# EAGLE board PCB BOARD (EAGLE 9.0.0)
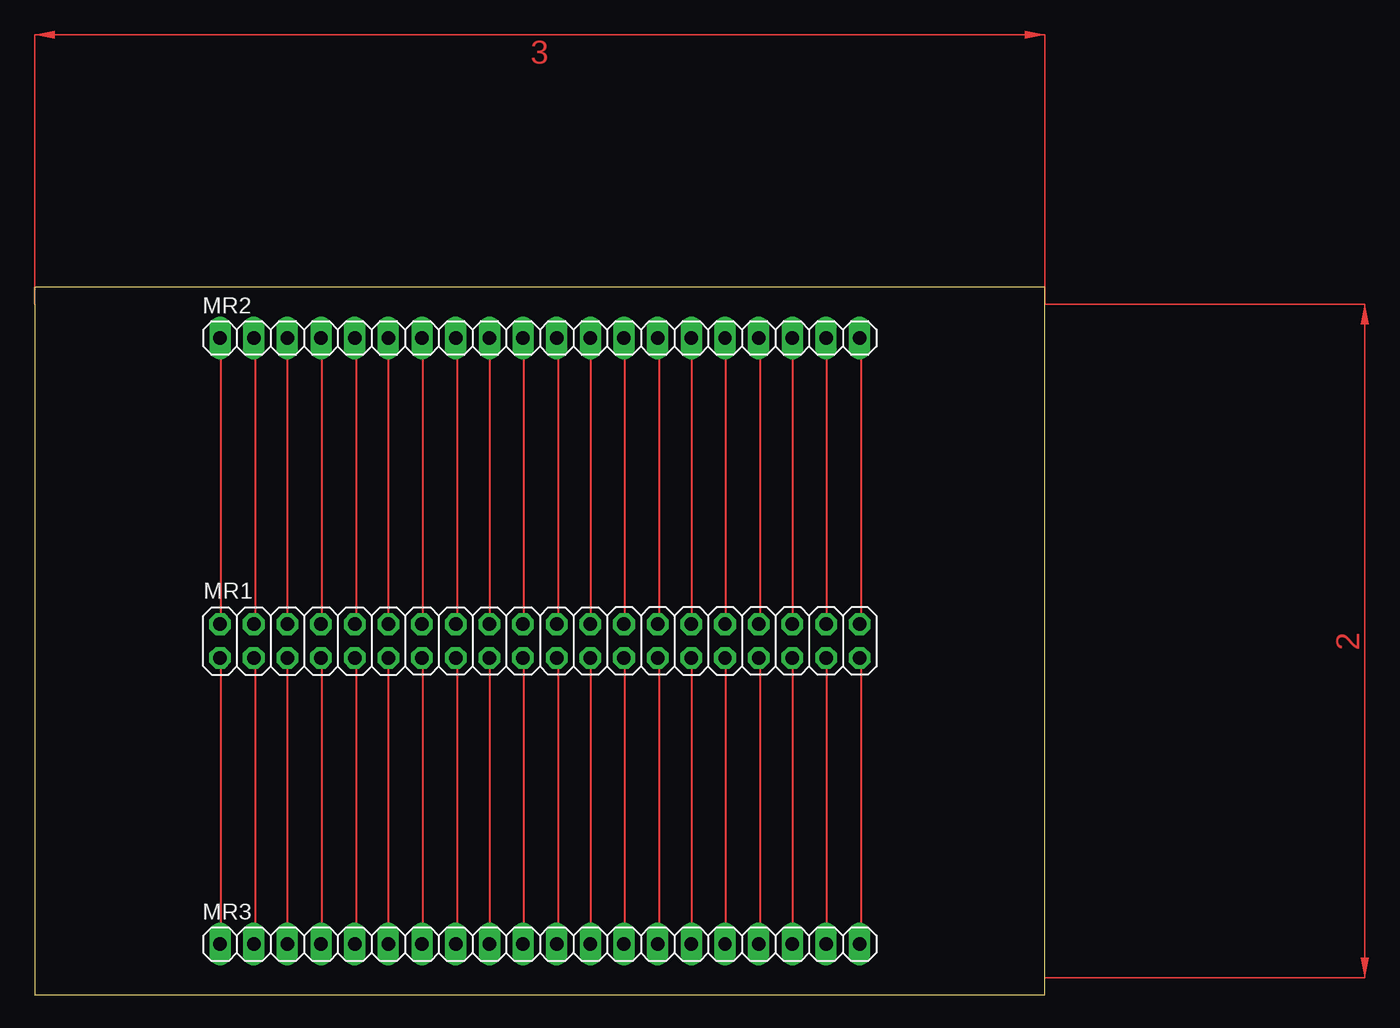
[diagram p0: board, top side]

Size 76.2 x 53.34 mm. Coordinates in mm from the lower left corner, seen from the top.
Outline: 0,0 76.2,0 76.2,53.34 0,53.34 0,0
Copper layers (1*16): Top 0.035mm / dielectric 1.5mm / Bottom 0.035mm
Design rules "SparkFun": minimum track width 8mil, minimum drill 20mil, track to track 8mil, track to pad 8mil, pad to pad 8mil, via to via 8mil, smd to smd 8mil, copper to edge 10mil, drill to drill 8mil, minimum pad ring 12mil, minimum via ring 10mil, stop-mask expansion 4mil, vias tented up to drill 25mil, thermal gap 10mil

## Footprints (pad centres in the part's own frame; a part is rotated, then mirrored left to right if it is on the bottom)
2X20 = drill 1.016 octagon: 1 -24.13,-1.27; 2 -24.13,1.27; 3 -21.59,-1.27; 4 -21.59,1.27; 5 -19.05,-1.27; 6 -19.05,1.27; 7 -16.51,-1.27; 8 -16.51,1.27; 9 -13.97,-1.27; 10 -13.97,1.27; 11 -11.43,-1.27; 12 -11.43,1.27; 13 -8.89,-1.27; 14 -8.89,1.27; 15 -6.35,-1.27; 16 -6.35,1.27; 17 -3.81,-1.27; 18 -3.81,1.27; 19 -1.27,-1.27; 20 -1.27,1.27; 21 1.27,-1.27; 22 1.27,1.27; 23 3.81,-1.27; 24 3.81,1.27; 25 6.35,-1.27; 26 6.35,1.27; 27 8.89,-1.27; 28 8.89,1.27; 29 11.43,-1.27; 30 11.43,1.27; 31 13.97,-1.27; 32 13.97,1.27; 33 16.51,-1.27; 34 16.51,1.27; 35 19.05,-1.27; 36 19.05,1.27; 37 21.59,-1.27; 38 21.59,1.27; 39 24.13,-1.27; 40 24.13,1.27
1X20 = drill 1.016 long: 1 -24.13,0; 2 -21.59,0; 3 -19.05,0; 4 -16.51,0; 5 -13.97,0; 6 -11.43,0; 7 -8.89,0; 8 -6.35,0; 9 -3.81,0; 10 -1.27,0; 11 1.27,0; 12 3.81,0; 13 6.35,0; 14 8.89,0; 15 11.43,0; 16 13.97,0; 17 16.51,0; 18 19.05,0; 19 21.59,0; 20 24.13,0

## Placement (x,y rotation side)
MR1  [2X20]  38.1,26.67 0 top
MR2  [1X20]  38.1,49.53 0 top
MR3  [1X20]  38.1,3.81 0 top

## Library data of the parts
MR1-MR3 = pinhead

## Nets
GND: MR1.21 MR3.11
N$1: MR1.1 MR3.1
N$2: MR1.9 MR3.5
N$3: MR1.3 MR3.2
N$4: MR1.5 MR3.3
N$5: MR1.7 MR3.4
N$6: MR1.11 MR3.6
N$7: MR1.13 MR3.7
N$8: MR1.15 MR3.8
N$9: MR1.17 MR3.9
N$10: MR1.19 MR3.10
N$11: MR1.2 MR2.1
N$13: MR1.25 MR3.13
N$14: MR1.27 MR3.14
N$15: MR1.29 MR3.15
N$16: MR1.31 MR3.16
N$17: MR1.33 MR3.17
N$18: MR1.35 MR3.18
N$19: MR1.37 MR3.19
N$20: MR1.39 MR3.20
N$21: MR1.40 MR2.20
N$22: MR1.38 MR2.19
N$23: MR1.36 MR2.18
N$24: MR1.34 MR2.17
N$25: MR1.32 MR2.16
N$26: MR1.30 MR2.15
N$27: MR1.28 MR2.14
N$28: MR1.26 MR2.13
N$29: MR1.24 MR2.12
N$30: MR1.22 MR2.11
N$31: MR1.20 MR2.10
N$32: MR1.18 MR2.9
N$33: MR1.16 MR2.8
N$34: MR1.14 MR2.7
N$35: MR1.12 MR2.6
N$36: MR1.10 MR2.5
N$37: MR1.8 MR2.4
N$38: MR1.6 MR2.3
N$39: MR1.4 MR2.2
VCC: MR1.23 MR3.12

## Tracks (layer width: path | path; a pad name or v marks a point on that pad's centre or on a via)
GND
  Top 0.152: MR3.11 39.47,3.86 39.47,25.35 MR1.21
N$1
  Top 0.152: MR3.1 14.02,3.86 14.02,25.35 MR1.1
N$2
  Top 0.152: MR3.5 24.23,3.86 24.23,25.35 MR1.9
N$3
  Top 0.152: MR3.2 16.61,3.86 16.61,25.35 MR1.3
N$4
  Top 0.152: MR1.5 MR3.3
N$5
  Top 0.152: MR3.4 21.64,3.86 21.64,25.35 MR1.7
N$6
  Top 0.152: MR1.11 MR3.6
N$7
  Top 0.152: MR3.7 29.26,3.86 29.26,25.35 MR1.13
N$8
  Top 0.152: MR3.8 31.85,3.86 31.85,25.35 MR1.15
N$9
  Top 0.152: MR1.17 MR3.9
N$10
  Top 0.152: MR3.10 36.88,3.86 36.88,25.35 MR1.19
N$11
  Top 0.152: MR1.2 14.02,27.94 14.02,48.16 MR2.1
N$13
  Top 0.152: MR3.13 44.5,3.86 44.5,25.35 MR1.25
N$14
  Top 0.152: MR3.14 47.09,3.86 47.09,25.35 MR1.27
N$15
  Top 0.152: MR1.29 MR3.15
N$16
  Top 0.152: MR3.16 52.12,3.86 52.12,25.35 MR1.31
N$17
  Top 0.152: MR3.17 54.71,3.86 54.71,25.35 MR1.33
N$18
  Top 0.152: MR1.35 MR3.18
N$19
  Top 0.152: MR3.19 59.74,3.86 59.74,25.35 MR1.37
N$20
  Top 0.152: MR3.20 62.33,3.86 62.33,25.35 MR1.39
N$21
  Top 0.152: MR1.40 62.33,27.94 62.33,49.43 MR2.20
N$22
  Top 0.152: MR1.38 59.74,27.94 59.74,49.43 MR2.19
N$23
  Top 0.152: MR2.18 MR1.36
N$24
  Top 0.152: MR1.34 54.71,27.94 54.71,49.43 MR2.17
N$25
  Top 0.152: MR1.32 52.12,27.94 52.12,49.43 MR2.16
N$26
  Top 0.152: MR2.15 MR1.30
N$27
  Top 0.152: MR1.28 47.09,27.94 47.09,49.43 MR2.14
N$28
  Top 0.152: MR1.26 44.5,27.94 44.5,49.43 MR2.13
N$29
  Top 0.152: MR2.12 MR1.24
N$30
  Top 0.152: MR1.22 39.47,27.94 39.47,49.43 MR2.11
N$31
  Top 0.152: MR1.20 36.88,27.94 36.88,49.43 MR2.10
N$32
  Top 0.152: MR2.9 MR1.18
N$33
  Top 0.152: MR1.16 31.85,27.94 31.85,49.43 MR2.8
N$34
  Top 0.152: MR1.14 29.26,27.94 29.26,49.43 MR2.7
N$35
  Top 0.152: MR2.6 MR1.12
N$36
  Top 0.152: MR1.10 24.23,27.94 24.23,49.43 MR2.5
N$37
  Top 0.152: MR1.8 21.64,27.94 21.64,49.43 MR2.4
N$38
  Top 0.152: MR2.3 MR1.6
N$39
  Top 0.152: MR1.4 16.61,27.94 16.61,49.43 MR2.2
VCC
  Top 0.152: MR1.23 MR3.12
(copper drawn outside any net)
  shapes: Top area x2